# Altium PCB PCB1-B-EVT2.PcbDoc (part 1 of 2)
Units mil, origin at the board's own origin, x right, y up, seen from the top; angles counter-clockwise.
Board outline 2476 x 3729 mil, 2 copper layers (Top Layer, Bottom Layer); 100 components, 79 nets, 360 pads, 170 vias.
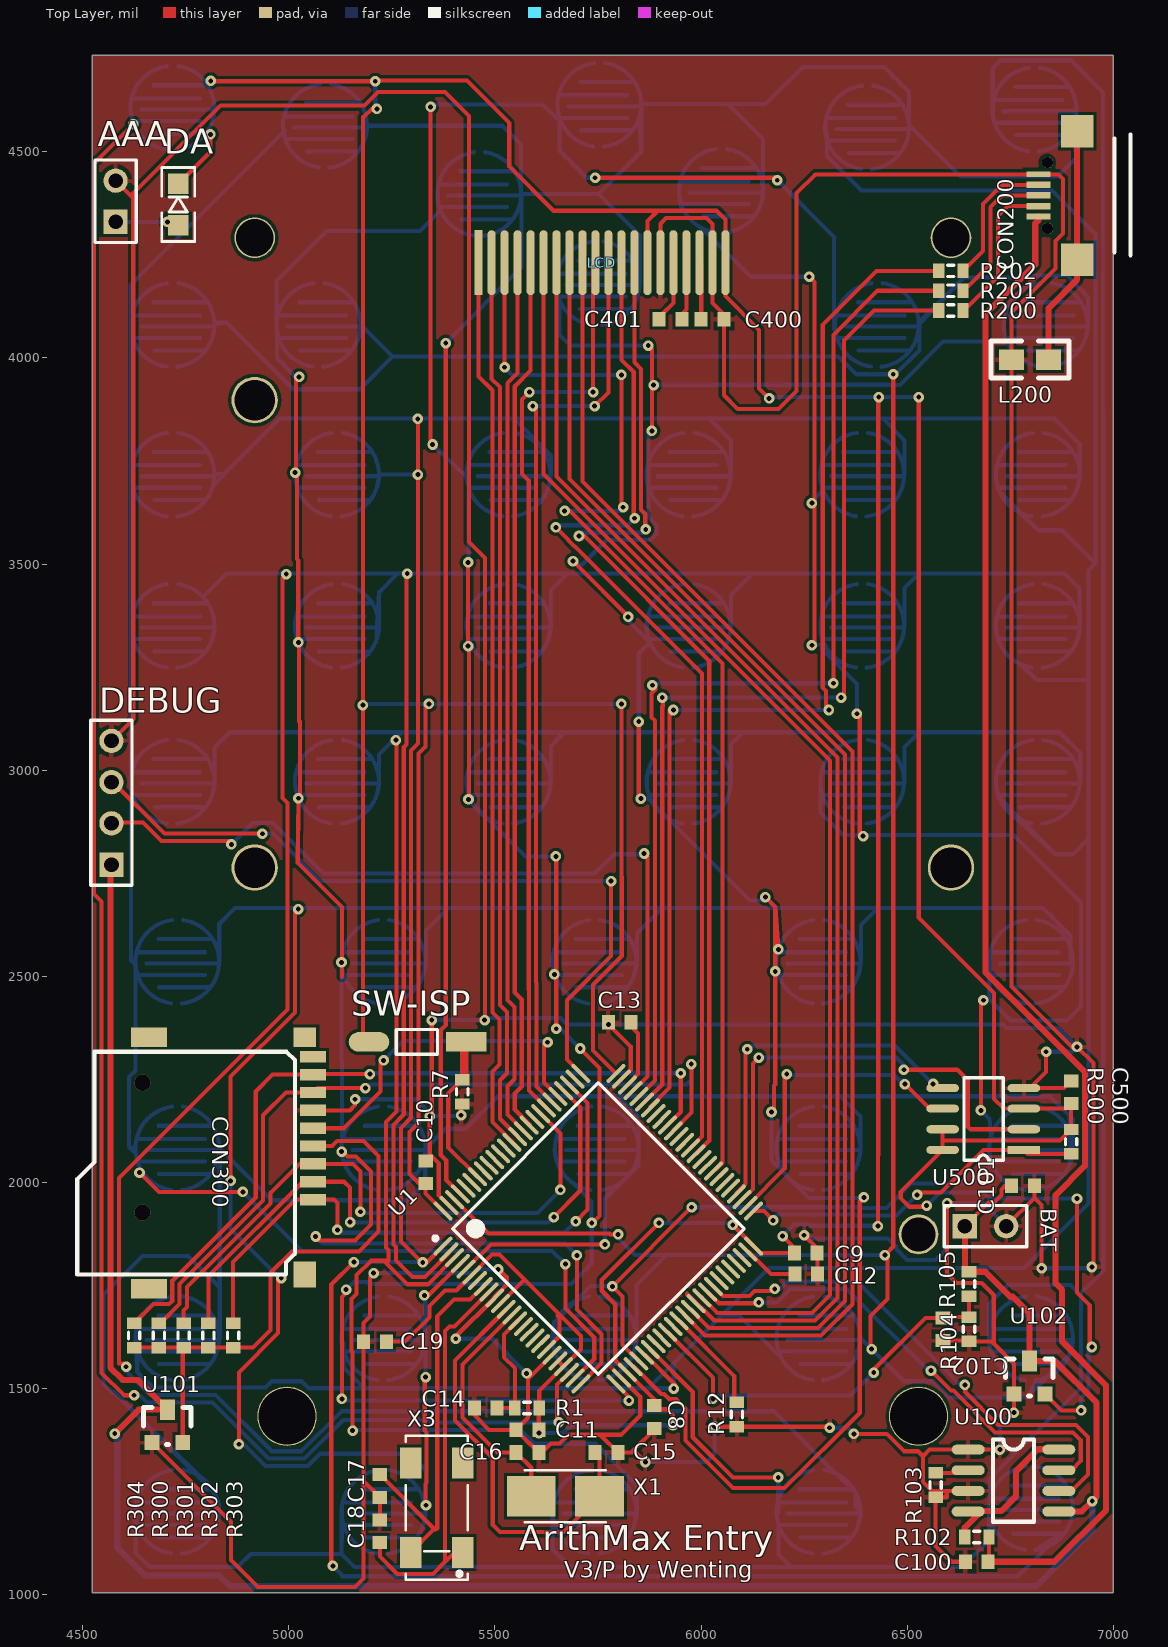
[diagram p0: Top Layer view]
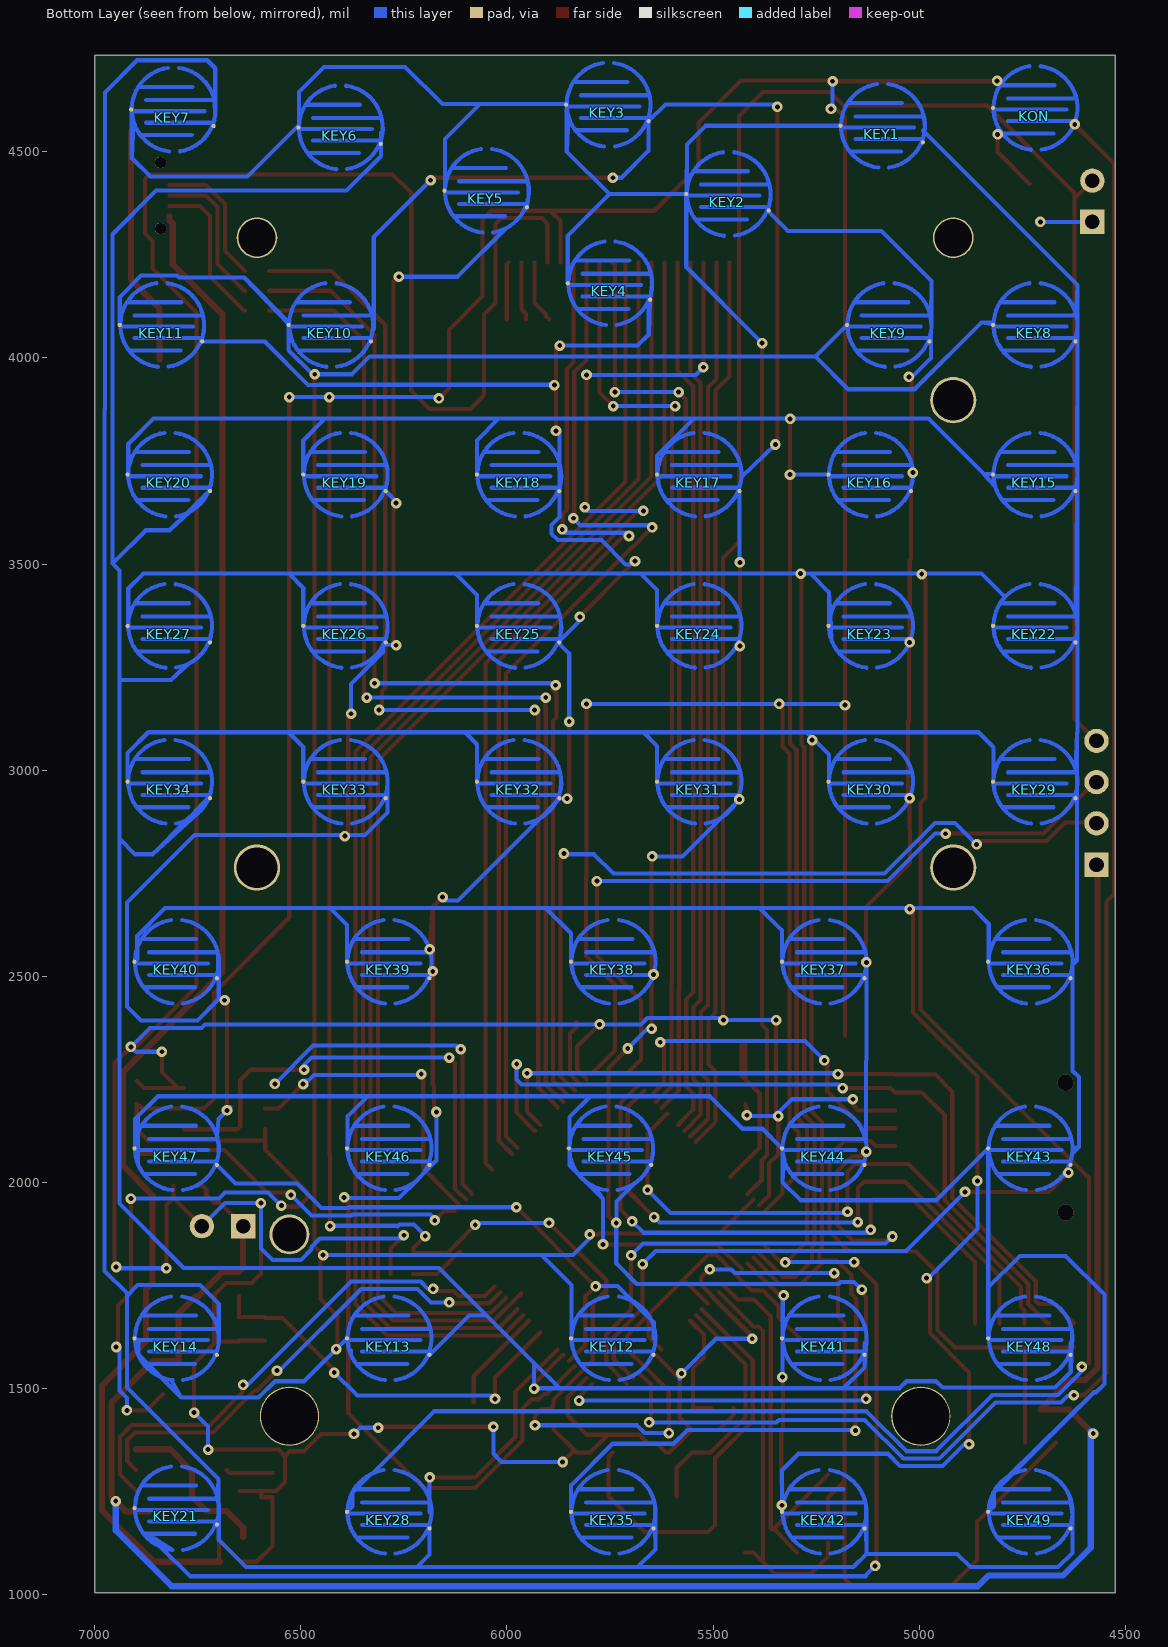
[diagram p1: Bottom Layer view, seen from below]

## Layer stack, top to bottom
Top Layer: signal copper 1.4
Dielectric: dielectric 12.6, FR-4, Dk 4.8
Bottom Layer: signal copper 1.4

## Board outline
4524,1005 4524,4734 7000,4734 7000,1005

## Design rules (kind name [scope] priority, off if disabled: settings)
Clearance [All] p1: gap=8
HoleSize [All] p1: absolutevalues=TRUE maxlimit=250 minlimit=11.81 maxpercent=80.000 minpercent=20.000
MinimumSolderMaskSliver [All] p1 off: minsoldermaskwidth=10
NetAntennae [All] p1 off: netantennaetolerance=0
PolygonConnect [All] p1: connectstyle=Relief reliefconductorwidth=10 reliefentries=4 polygonreliefangle="90 Angle" airgapwidth=10
RoutingVias [All] p1: holewidth=11.81 width=25.59 viastyle="Through Hole" minholewidth=11.81 minwidth=25.59 maxholewidth=11.81 maxwidth=25.59
SilkToSilkClearance [All] p1 off: silktosilkclearance=10
SilkToSolderMaskClearance SilkscreenOverComponentPads [IsPad] p1: minsilkscreentomaskgap=0 clearancetoexposedcopper=TRUE
SolderMaskExpansion [All] p1: expansion=4
Width [All] p1: maxlimit=20 minlimit=10 preferedwidth=10
23 further rules are at their usual default settings.

## Components (designator, comment, footprint, x,y, rotation, side; value= is the part's Value field where it differs from the comment)
AAA "Header 2" HDR1X2 4580,4330 r90 top
BAT "Header 2" HDR1X2 6640,1894 r0 top
C8 "104" 1608[0603] 5887,1431 r270 top
C9 "104" 1608[0603] 6254,1829 r0 top
C10 "104" 1608[0603] 5332,2025 r90 top
C11 "104" 1608[0603] 5579,1400 r180 top
C12 "2.2uF" 1608[0603] 6255,1778 r0 top
C13 "2.2uF" 1608[0603] 5803,2389 r180 top
C14 "104" 1608[0603] 5478,1453 r0 top
C15 "22pF" 1608[0603] 5771,1345 r0 top
C16 "22pF" 1608[0603] 5579,1345 r0 top
C17 "12pF" 1608[0603] 5221,1264 r270 top
C18 "12pF" 1608[0603] 5221,1154 r90 top
C19 "4.7uF" 1608[0603] 5209,1614 r180 top
C100 "105" 1608[0603] 6669,1080 r0 top
C101 "105" 1608[0603] 6781,1992 r180 top
C102 "0.1uF" 1608[0603] 6587,1644 r90 top
C400 "2.2uF" 1608[0603] 6028,4094 r180 top
C401 "0.1uF" 1608[0603] 5926,4094 r0 top
C500 "104" 1608[0603] 6897.85,2219 r90 top
CON200 "USB-MINIAB" USB-MICRO 6924,4394 r90 top
CON300 "TF" TF-2 4860,2047 r180 top
DA "1N4148" 0805D 4684,4349 r90 top
DEBUG "Header 4" HDR1X4 4570,2771 r90 top
KEY1 "Button" BUTTON#1 5311.02,4562.99 r180 bottom
KEY2 "Button" BUTTON#1 5685.04,4397.64 r180 bottom
KEY3 "Button" BUTTON#1 5976.38,4614.17 r180 bottom
KEY4 "Button" BUTTON#1 5972.44,4181.1 r180 bottom
KEY5 "Button" BUTTON#1 6271.65,4405.51 r180 bottom
KEY6 "Button" BUTTON#1 6625.98,4559.06 r180 bottom
KEY7 "Button" BUTTON#1 7031.5,4602.36 r180 bottom
KEY8 "Button" BUTTON#1 4941,4080 r180 bottom
KEY9 "Button" BUTTON#1 5295.28,4080 r180 bottom
KEY10 "Button" BUTTON#1 6649.61,4080 r180 bottom
KEY11 "Button" BUTTON#1 7059.06,4080 r180 bottom
KEY12 "Button" BUTTON#1 5964.5,1622 r180 bottom
KEY13 "Button" BUTTON#1 6507.9,1622 r180 bottom
KEY14 "Button" BUTTON#1 7023.6,1622 r180 bottom
KEY15 "Button" BUTTON#1 4941,3717 r180 bottom
KEY16 "Button" BUTTON#1 5340,3717 r180 bottom
KEY17 "Button" BUTTON#1 5756,3717 r180 bottom
KEY18 "Button" BUTTON#1 6193,3717 r180 bottom
KEY19 "Button" BUTTON#2 6614,3717 r180 bottom
KEY20 "Button" BUTTON#1 7040,3717 r180 bottom
KEY21 "Button" BUTTON#1 7023.6,1210 r180 bottom
KEY22 "Button" BUTTON#1 4941,3350 r180 bottom
KEY23 "Button" BUTTON#1 5340,3350 r180 bottom
KEY24 "Button" BUTTON#1 5756,3350 r180 bottom
KEY25 "Button" BUTTON#1 6193,3350 r180 bottom
KEY26 "Button" BUTTON#1 6614,3350 r180 bottom
KEY27 "Button" BUTTON#1 7040,3350 r180 bottom
KEY28 "Button" BUTTON#1 6507.9,1201 r180 bottom
KEY29 "Button" BUTTON#1 4941,2972 r180 bottom
KEY30 "Button" BUTTON#1 5340,2972 r180 bottom
KEY31 "Button" BUTTON#1 5756,2972 r180 bottom
KEY32 "Button" BUTTON#1 6193,2972 r180 bottom
KEY33 "Button" BUTTON#1 6614,2972 r180 bottom
KEY34 "Button" BUTTON#1 7040,2972 r180 bottom
KEY35 "Button" BUTTON#1 5964.5,1201 r180 bottom
KEY36 "Button" BUTTON#1 4952.7,2535.4 r180 bottom
KEY37 "Button" BUTTON#1 5452.7,2535.4 r180 bottom
KEY38 "Button" BUTTON#1 5964.5,2535.4 r180 bottom
KEY39 "Button" BUTTON#1 6507.9,2535.4 r180 bottom
KEY40 "Button" BUTTON#1 7023.6,2535.4 r180 bottom
KEY41 "Button" BUTTON#1 5452.7,1622 r180 bottom
KEY42 "Button" BUTTON#1 5452.7,1201 r180 bottom
KEY43 "Button" BUTTON#1 4952.7,2082.7 r180 bottom
KEY44 "Button" BUTTON#1 5452.7,2082.7 r180 bottom
KEY45 "Button" BUTTON#1 5970,2082.72 r180 bottom
KEY46 "Button" BUTTON#1 6507.9,2082.7 r180 bottom
KEY47 "Button" BUTTON#1 7023.6,2082.7 r180 bottom
KEY48 "Button" BUTTON#1 4952.7,1622 r180 bottom
KEY49 "Button" BUTTON#1 4952.7,1201 r180 bottom
KON "Button" BUTTON#1 4941,4606.3 r180 bottom
L200 "BLM21PG221SN1" 0805 6843,3996 r180 top
LCD "FPC14591A" LCD_20P 5870,4231 r0 top
R1 "10K" J1-0603 5578,1453 r0 top
R7 "10K" J1-0603 5421,2220 r90 top
R12 "0R" J1-0603 6087,1437 r270 top
R102 "0.4R" J1-0603 6669,1140 r0 top
R103 "5K" J1-0603 6569,1266 r90 top
R104 "1M" J1-0603 6650,1644 r90 top
R105 "1M" J1-0603 6650,1754 r90 top
R200 "22R" J1-0603 6606,4115 r0 top
R201 "22R" J1-0603 6606,4163 r0 top
R202 "0R" J1-0603 6606,4211 r0 top
R300 "47K" J1-0603 4685,1629 r270 top
R301 "47K" J1-0603 4745,1629 r270 top
R302 "47K" J1-0603 4805,1629 r270 top
R303 "47K" J1-0603 4865,1629 r270 top
R304 "47K" J1-0603 4625,1629 r270 top
R500 "10K" J1-0603 6897.85,2099 r90 top
SW-ISP "SW-PB" SOP2 5431,2341 r180 top
U1 "STM32F407VG" 100T1_L 5751,1888 r45 top
U100 "TP4056" SO-8 6648,1352 r0 top
U101 "6209" SOT-23 4668,1369 r0 top
U102 "6209" SOT-23 6759,1487 r0 top
U500 "W25X64" SOIC8 6783,2079 r180 top
X1 "25MHz" 5032 5671,1239 r0 top
X3 "MC306-G-06Q-32.768 (manufacturer JFVNY)" SM8 5359,1211 r90 top

## Footprints (in the part's own frame and the unit in brackets; to place one, negate y for a bottom-side part, rotate by r counter-clockwise, add the part's x,y. Pads: shape width x height; smd on the part's side, far side on the other; paste and mask are expansions set on the pad)
100T1_L [mm] "100-Pin Thin Quad Flat Pack 0.5 mm Pitch, IPC High Density"
  oval 1.55x0.25 smd: 1(-7.525,6) 2(-7.525,5.5) 3(-7.525,5) 4(-7.525,4.5) 5(-7.525,4) 6(-7.525,3.5) 7(-7.525,3) 8(-7.525,2.5) 9(-7.525,2) 10(-7.525,1.5) 11(-7.525,1) 12(-7.525,0.5) 13(-7.525,0) 14(-7.525,-0.5) 15(-7.525,-1) 16(-7.525,-1.5) 17(-7.525,-2) 18(-7.525,-2.5) 19(-7.525,-3) 20(-7.525,-3.5) 21(-7.525,-4) 22(-7.525,-4.5) 23(-7.525,-5) 24(-7.525,-5.5) 25(-7.525,-6) 51(7.525,-6) 52(7.525,-5.5) 53(7.525,-5) 54(7.525,-4.5) 55(7.525,-4) 56(7.525,-3.5) 57(7.525,-3) 58(7.525,-2.5) 59(7.525,-2) 60(7.525,-1.5) 61(7.525,-1) 62(7.525,-0.5) 63(7.525,0) 64(7.525,0.5) 65(7.525,1) 66(7.525,1.5) 67(7.525,2) 68(7.525,2.5) 69(7.525,3) 70(7.525,3.5) 71(7.525,4) 72(7.525,4.5) 73(7.525,5) 74(7.525,5.5) 75(7.525,6)
  oval 0.25x1.55 smd: 26(-6,-7.525) 27(-5.5,-7.525) 28(-5,-7.525) 29(-4.5,-7.525) 30(-4,-7.525) 31(-3.5,-7.525) 32(-3,-7.525) 33(-2.5,-7.525) 34(-2,-7.525) 35(-1.5,-7.525) 36(-1,-7.525) 37(-0.5,-7.525) 38(0,-7.525) 39(0.5,-7.525) 40(1,-7.525) 41(1.5,-7.525) 42(2,-7.525) 43(2.5,-7.525) 44(3,-7.525) 45(3.5,-7.525) 46(4,-7.525) 47(4.5,-7.525) 48(5,-7.525) 49(5.5,-7.525) 50(6,-7.525) 76(6,7.525) 77(5.5,7.525) 78(5,7.525) 79(4.5,7.525) 80(4,7.525) 81(3.5,7.525) 82(3,7.525) 83(2.5,7.525) 84(2,7.525) 85(1.5,7.525) 86(1,7.525) 87(0.5,7.525) 88(0,7.525) 89(-0.5,7.525) 90(-1,7.525) 91(-1.5,7.525) 92(-2,7.525) 93(-2.5,7.525) 94(-3,7.525) 95(-3.5,7.525) 96(-4,7.525) 97(-4.5,7.525) 98(-5,7.525) 99(-5.5,7.525) 100(-6,7.525)
  silkscreen extent -7.65,-6.35 6.35,6.8, body extent -7,-7 7,7, height 1.05
0805 [mil]
  rect 60x50 smd: 1(0,0) 2(90,0)
  silkscreen extent -50,-45 140,45
0805D [mil]
  rect 50x50 smd: A(-27,-48) K(73,-48)
  silkscreen extent -67,-88 113,-8
1608[0603] [mm] "Chip Capacitor, Body 1.6x0.8mm, IPC High Density"
  rect 0.8x0.9 smd: 1(-0.7,0) 2(0.7,0)
  body extent -0.87,-0.48 0.87,0.48, height 1.3
5032 [mm]
  rect 3x2.5 smd: 1(-2.1,0) 2(2.1,0)
  silkscreen extent -2.5,-1.6 2.5,1.6
BUTTON#1 [mil]
  round 10 smd: 1(120,0) 2(320,-40)
  Top Layer lines w10: 321,23 156,23 ; 320,-31 319,-32 156,-32 ; 298,-4 124,-4 ; 269,55 138,55 ; 267,-62 143,-62 ; 238.02,-101.12 ccw(c222.55,-0.14) 235.89,101.15 ; 211.96,-101.38 cw(c223.45,0.14) 208.82,101.24
BUTTON#2 [mil]
  round 10 smd: 1(120,0) 2(320,-40)
  Top Layer lines w10: 321,23 156,23 ; 320,-31 319.91,-31.09 ; 298,-4 124,-4 ; 269,55 138,55 ; 267,-62 143,-62 ; 238.02,-101.12 ccw(c222.55,-0.14) 319.91,-31.09 ; 235.89,101.15 cw(c222.55,-0.14) 319.91,-31.09 ; 211.96,-101.38 cw(c223.45,0.14) 208.82,101.24 ; 156,-32 319,-32 319.91,-31.09
HDR1X2 [mm] "Connector; Header; 2 Position"
  rect 1.5x1.5 hole 0.9: 1(0,0)
  round 1.5 hole 0.9: 2(2.54,0)
  silkscreen extent -1.27,-1.27 3.81,1.27
HDR1X4 [mm] "Connector; Header; 4 Position"
  rect 1.5x1.5 hole 0.9: 1(0,0)
  round 1.5 hole 0.9: 2(2.54,0) 3(5.08,0) 4(7.62,0)
  silkscreen extent -1.27,-1.27 8.89,1.27
J1-0603 [mm] "Chip Resistor, Body 1.6x0.8mm, IPC High Density"
  rect 0.7x0.9 smd: 1(-0.75,0) 2(0.75,0)
  silkscreen extent -0.2,-0.35 0.2,0.35, body extent -0.85,-0.48 0.85,0.48, height 0.9
LCD_20P [mm]
  rect 0.5x4 smd: 1(-10.4,0)
  oval 0.5x4 smd: 2(-9.6,0) 3(-8.8,0) 4(-8,0) 5(-7.2,0) 6(-6.4,0) 7(-5.6,0) 8(-4.8,0) 9(-4,0) 10(-3.2,0) 11(-2.4,0) 12(-1.6,0) 13(-0.8,0) 14(0,0) 15(0.8,0) 16(1.6,0) 17(2.4,0) 18(3.2,0) 19(4,0) 20(4.8,0)
SM8 [mm]
  rect 1.9x1.3 smd: 1(-2.75,-1.6) 2(2.75,-1.6) 3(2.75,1.6) 4(-2.75,1.6)
  silkscreen extent -4.44,-1.91 4.44,1.91
SO-8 [mil]
  oval 80x24 smd: 1(0,0) 2(0,-50) 3(0,-100) 4(0,-150) 5(220,-150) 6(220,-100) 7(220,-50) 8(220,0)
  silkscreen extent 60,-175 160,25
SOIC8 [mm]
  rect 2x0.5 smd: 1(0,0)
  oval 2x0.5 smd: 2(0,-1.27) 3(0,-2.54) 4(0,-3.81) 5(5,-3.81) 6(5,-2.54) 7(5,-1.27) 8(5,0)
  silkscreen extent 1.27,-4.44 3.68,0.64
SOP2 [mm]
  rect 2.5x1.2 smd: 1(0,0)
  oval 2.5x1.2 smd: 2(6,0)
  silkscreen extent 1.78,-0.76 4.32,0.76
SOT-23 [mil]
  rect 36x36 smd: 1(0,0) 2(75,0)
  rect 36x50 smd: 3(38,80)
  silkscreen extent -20,-5 95,85
TF-2 [mm]
  rect 1.4x1.6 smd: 0(-4.55,6.85)
  rect 1.4x1.2 smd: 0(-4.55,-7.75)
  rect 2.2x1.2 smd: 0(5.05,7.75) 0(5.05,-7.75)
  rect 1.6x0.7 smd: 1(-5.05,2.25) 2(-5.05,1.15) 3(-5.05,0.05) 4(-5.05,-1.05) 5(-5.05,-2.15) 6(-5.05,-3.25) 7(-5.05,-4.35) 8(-5.05,-5.45) 9(-5.05,-6.55)
  silkscreen extent -3.94,-6.88 9.47,6.86
USB-MICRO [mm]
  rect 0.35x1.5 smd: 1(-1.3,2.675) 5(1.3,2.675)
  rect 0.4x1.5 smd: 2(-0.65,2.675) 3(0,2.675) 4(0.65,2.675)
  round 0.7 hole 0.7 unplated: 6(-2.032,2.134) 7(2.032,2.134)
  rect 2x2 smd: 8(-3.95,0.3) 9(3.95,0.3)
  silkscreen extent -3.68,-3 3.75,-2

## Part data
AAA BAT: "Header, 2-Pin"
C8 C9 C10 C11 C12 C13 C14 C15 C16 C17 C18 C100 C101 C102 C400 C401 C500: library part "Cap Semi", "Capacitor (Semiconductor SIM Model)"
C19: library part EC
DEBUG: "Header, 4-Pin"
L200: library part BEAD__FERRITE, "EMI Suppression Filters,2A,0805"
R1 R7 R12 R102 R103 R104 R105 R200 R201 R202 R300 R301 R302 R303 R304 R500: library part Res3, "Resistor"
SW-ISP: "Switch"
U1: "ARM Cortex-M3 Microcontroller"
U500: library part W25X16
X1: library part CRY
X3: library part MC306

## Free pads (board coordinates)
  round 112.2 hole 98.43: 0(4917.32,2763.78) 0(4917.32,3897.64) 0(6606.3,2763.78)
  round 98.43 hole 90.55: 0(4917.32,4291.34) 0(6606.3,4291.34)
  round 143.7 hole 137.8: 0(4996.06,1433.07) 0(6527.56,1433.07)
  round 96.46 hole 82.68: 0(6527.56,1874.02)

## Via types
v1: diameter 25.59, hole 11.81, Top Layer to Bottom Layer, tented both sides, 168 vias
v2: diameter 39.37, hole 39.37, Top Layer to Bottom Layer, tented both sides, 2 vias

## Nets (pads, with @x,y where several pads share a name; then routed paths per layer and width w, separated by ;. In a path a pad name is that pad's centre, name@x,y a point inside that pad or via, vN(x,y) a via of type N, cw(c..) or ccw(c..) an arc to the next point about the centre after c; other vN are vias at no path point)
ADC12_IN8: C102.2 R104.2 R105.1 U1.35 | length 965.7
  Top Layer w10: U1.35@5918.73,1636.75 6029,1526.48 v1(6029,1475) ; v1(6419,1539) 6419,1546 6544.56,1671.56 C102.2@6587,1671.56 6588.97,1673.53 R104.2@6650,1673.53 R105.1@6650,1724.47
  Bottom Layer w10: v1(6029,1475) 6037,1483 6363,1483 v1(6419,1539)
BOOT0: R7.2 SW-ISP.1 U1.94 | length 476.3
  Top Layer w10: U1.94@5458,2013.97 5386.79,2085.18 5386.79,2215.32 R7.2@5421,2249.53 ; R7.2@5421,2249.53 5421,2341 SW-ISP.1@5431,2341 5431,2259.53 R7.2@5421,2249.53
BOOT1: R12.1 U1.37 | length 253.6
  Top Layer w10: U1.37@5946.57,1664.59 6080.53,1530.63 R12.1@6080.53,1466.53
CHRG: U1.42 U100.7 | length 1171
  Top Layer w10: U1.42@6016.17,1734.19 6043.36,1707 6138,1707 v1(6140,1709) ; v1(6557.8,1543.72) 6606.52,1495 6612,1495 6713,1394 6902.54,1394 6921,1375.54 6921,1324 U100.7@6900,1303
  Bottom Layer w10: v1(6140,1709) 6184,1709 6216.6,1741.6 6353.4,1741.6 6554,1541 6560.52,1541 v1(6557.8,1543.72)
FSMC_A16: LCD.3 U1.58 | length 2772.1
  Top Layer w10: v1(5523.54,3977.46) LCD.3@5523.54,4231 ; v1@5680.54,3630 6052.18,3258.36 6052.18,2047.49 U1.58@6035.84,2031.16 ; v1@5807,3637.85 v1(5807,3959)
  Bottom Layer w10: v1(5523.54,3977.46) 5542,3959 v1(5807,3959) ; v1(5669,3629) 5804,3629 5811,3636 v1(5811,3637.85)
FSMC_D0: LCD.13 U1.61 | length 2477.7
  Top Layer w10: v1(5704,3568) 5717.09,3568 6020,3265.09 6020,2101.32 U1.61@5988.33,2069.65 ; LCD.13@5838.5,4231 5838.5,3989.43 5854.8,3973.14 5854.8,3631.68 5864.8,3621.68 5864.8,3590.76 5864,3589.96 5864,3586 v1(5866,3584)
  Bottom Layer w10: v1(5704,3568) 5712,3576 5858,3576 v1(5866,3584)
FSMC_D1: LCD.12 U1.62 | length 2497.3
  Top Layer w10: v1(5648,3589) 5678.2,3558.8 5678.2,3557.32 5693.32,3542.2 5694.8,3542.2 6002,3235 6002,2111.16 U1.62@5974.41,2083.57 ; LCD.12@5807.01,4231 5807.01,3995.47 5836.8,3965.68 5836.8,3615.26 v1(5839,3611)
  Bottom Layer w10: v1(5648,3589) 5653,3594 5822,3594 v1(5839,3611)
FSMC_D2: LCD.11 U1.81 | length 2210.1
  Top Layer w10: v1@5600.03,3877 5600.03,2485.62 5601.21,2484.44 5601.21,2232.66 U1.81@5638.95,2194.92 ; v1(5742,3883) 5775.51,3916.51 LCD.11@5775.51,4231
  Bottom Layer w10: v1(5592,3883) v1(5742,3883)
FSMC_D3: LCD.10 U1.82 | length 2238.6
  Top Layer w10: v1(5583.59,3917) 5566.2,3899.61 5566.2,3718.88 5582.03,3703.06 5582.03,2467.62 5583.21,2466.44 5583.21,2222.82 U1.82@5625.03,2181 ; v1(5738.31,3917) 5738.31,4225.3 LCD.10@5744.02,4231
  Bottom Layer w10: v1(5583.59,3917) v1(5738.31,3917)
FSMC_D4: LCD.9 U1.38 | length 3255.8
  Top Layer w10: LCD.9@5712.52,4231 5712.52,3699.85 6367,3045.37 6367,1704.63 6291.37,1629 6010,1629 U1.38@5960.49,1678.51
FSMC_D5: LCD.8 U1.39 | length 3216
  Top Layer w10: LCD.8@5681.02,4231 5681.02,3705.89 6349,3037.91 6349,1712.09 6283.91,1647 6019.84,1647 U1.39@5974.41,1692.43
FSMC_D6: LCD.7 U1.40 | length 3210.7
  Top Layer w10: LCD.7@5649.53,4231 5649.53,3711.93 6331,3030.46 6331,1719.54 6276.46,1665 6032.06,1665 5966.23,1730.83 5966.23,1728.45
FSMC_D7: LCD.6 U1.41 | length 3136.3
  Top Layer w10: LCD.6@5618.03,4231 5618.03,3717.97 6313,3023 6313,1727 6269,1683 6039.52,1683 U1.41@6002.25,1720.27
FSMC_NE1: LCD.1 U1.88 | length 2181.1
  Top Layer w10: LCD.1@5460.55,4231 5460.55,3955.2 5494.2,3921.54 5494.2,2412.63 5511.21,2395.62 5511.21,2286.38 5494.2,2269.37 5494.2,2147.18 5541.51,2099.87 U1.88@5541.51,2097.49
FSMC_NOE: LCD.5 U1.85 | length 2136.2
  Top Layer w10: U1.85@5583.27,2139.25 5583.27,2141.74 5548.2,2176.81 5548.2,2215.37 5565.21,2232.38 5565.21,2443.78 5548.2,2460.79 5548.2,3931.2 5586.54,3969.54 LCD.5@5586.54,4231
FSMC_NWE: LCD.4 U1.86 | length 2146.3
  Top Layer w10: LCD.4@5555.04,4231 5555.04,3963.49 5530.2,3938.66 5530.2,2442.79 5547.21,2425.78 5547.21,2250.38 5530.2,2233.37 5530.2,2164.47 U1.86@5569.35,2125.33
GND: AAA.2 BAT.2 C8.2 C9.2 C10.2 C11.2 C12.2 C13.2 C14.1 C15.2 C16.2 C17.2 C18.2 C19.2 C100.1 C101.1 C102.1 C400.1 C500.2 CON200.5 CON300.6 DEBUG.4 L200.2 LCD.15 LCD.19 R7.1 R12.2 R103.1 R104.1 U1.10 U1.20 U1.27 U1.74 U1.99 U100.1 U100.3 U101.1 U102.1 U500.4 | length 19295.8
  Top Layer w10: DEBUG.4@4570,3071 4623,3124 4623,4387 ; AAA.2@4580,4430 4623,4387 ; U101.1@4668,1369 4860,1177 4860,1084 4925,1019 5161,1019 5181.44,1039.44 5181.44,1276 ; CON300.6@5058.82,2174.95 5148,2174.95 5161,2187.95 v1(5161,2202) ; v1(5206,1780) 5197,1771 5197,1675 5181.44,1659.44 C19.2@5181.44,1614 5181.44,1276 ; C18.2@5221,1181.56 C17.2@5221,1236.44 5181.44,1276 ; v1(5342,2161) 5342,2067.72 5364,2045.72 5364,1968.77 U1.99@5388.4,1944.37 ; v1@5347,2166 v1(5347,2394) ; v1@5400.05,1620.95 5400.93,1620.07 5400.93,1621.45 v1@5405,1625.52 ; v1(5405,1621) v1@5405,1625.52 ; v1(5418,2163) 5418,2181 5421,2184 R7.1@5421,2190.47 ; C14.1@5450.44,1453 5450.44,1435.56 5486,1400 C11.2@5551.44,1400 ; v1@5476,2394 5476,3515 5437,3554 5437,4587 5379,4645 5217,4645 5184,4612 4835,4612 4623,4400 4623,4387 ; v1(5508,1789) 5510,1789 5529,1770 5529,1752.01 5499.75,1722.76 U1.10@5499.75,1720.27 ; U1.20@5638.95,1581.08 5580.75,1522.87 5580.75,1429.31 C11.2@5551.44,1400 ; v1(5775.44,2383.56) 5829.47,2329.53 5829.47,2272.7 U1.74@5807.37,2250.6 ; U1.27@5807.37,1525.4 5852.58,1480.19 5852.58,1434.58 5806,1388 5755.56,1388 ; v1(5865,1322) 5836.5,1350.5 ; C8.2@5887,1403.44 5887,1401 5836.5,1350.5 ; LCD.15@5901.5,4231 5901.5,4325.5 5915,4339 6013,4339 6027.48,4324.52 LCD.19@6027.48,4231 6027.48,4133.52 6055.56,4105.44 C400.1@6055.56,4094 6055.56,3909.44 6089,3876 6188,3876 6232,3920 6232,4400 6277.18,4445.18 CON200.5@6818.68,4445.18 6866.82,4445.18 6878,4434 6878,4301.43 6859.82,4283.24 6859.82,4216.82 6753,4110 L200.2@6753,3996 6753,2475.79 6899.79,2329 v1(6912,2329) 6951.57,2289.43 v1@6951.57,1797.57 ; v1(6033,1407.47) R12.2@6087,1407.47 6309.53,1407.47 v1(6312,1405) ; v1(6250,1872) 6282.56,1839.44 C9.2@6282.56,1828 ; C9.2@6281.56,1829 C9.2@6282.56,1828 ; C12.2@6282.56,1778 C9.2@6282.56,1828 ; v1(6371,1390) 6450.63,1390 6492.41,1348.22 6525.78,1348.22 6538,1336 ; C102.1@6587,1616.44 6648.03,1616.44 R104.1@6650,1614.47 6704.53,1614.47 6710,1609 ; v1(6597,1950) 6597,1779 6620,1756 6681,1756 6710,1727 6710,1609 ; C100.1@6641.44,1080 6607,1080 6569,1118 R103.1@6569,1236.47 6596,1236.47 6596,1252 ; U100.3@6648,1252 6596,1252 ; v1(6725,1352) U100.1@6648,1352 6554,1352 6538,1336 ; BAT.2@6740,1894 6808.56,1962.56 ; v1(6759,1442) U102.1@6759,1487 6759,1560 6710,1609 ; U500.4@6783,2229 U500.4@6798,2229 ; C101.1@6808.56,1992 6808.56,1962.56 ; v1(6826,1792) 6826,1945.12 6808.56,1962.56 ; v1(6837,2317) 6837,2268 U500.4@6798,2229 ; C500.2@6897.85,2246.56 6880.29,2229 U500.4@6798,2229 ; v1@5405,1625.52 5405,1627.9 5497.37,1720.27 U1.10@5499.75,1720.27 ; v1@5405,1625.52 U1.10@5499.75,1720.27 ; C11.2@5551.44,1400 5551.56,1400 5577,1374.56 ; 5577,1374.56 5577,1373 5583,1367 5584.56,1367 ; 5577,1374.56 5584.56,1367 ; 5584.56,1367 C16.2@5606.56,1345 5614,1345 5636,1367 5657,1367 5678,1388 5755.56,1388 ; 5755.56,1388 C15.2@5798.56,1345 5831,1345 5836.5,1350.5 ; 6538,1336 6538,1274 6560,1252 6596,1252
  Bottom Layer w10: v1(5161,2202) 5309,2202 v1@5350,2161 ; v1(5206,1780) 5447,1780 5456,1789 v1(5508,1789) ; v1(5342,2161) v1@5350,2161 ; v1(5347,2394) v1(5475,2394) ; v1@5400.05,1620.95 5493.05,1620.95 ; v1(5418,2163) 5416,2161 v1@5350,2161 ; v1@5479.8,2398.8 5659.68,2398.8 5674.92,2383.56 v1(5775.44,2383.56) 6732.44,2383.56 6741,2375 6866,2375 v1(6912,2329) 6900,2317 v1(6837,2317) ; 5493,1621 5493.05,1620.95 ; 5580.75,1522.87 5584,1530 v1(5577,1537) 5493.05,1620.95 ; v1(5865,1322) 6013,1322 6033,1342 v1(6033,1407.47) ; v1(6250,1872) 6250,1864 6454,1864 6474,1844 6474,1838 6500,1812 6569,1812 6597,1840 v1(6597,1950) 6684,1950 BAT.2@6740,1894 ; v1(6312,1405) 6356,1405 v1(6371,1390) ; v1(6725,1352) 6725,1408 v1(6759,1442) ; v1(6826,1792) v1@6949,1792
  other v1: 6948,1795
I2C1_SCL: U1.95
I2C1_SDA: U1.96
KI_0: KEY1.2 KEY8.2 KEY15.2 KEY22.2 KEY29.2 KEY36.2 KEY43.2 U1.24 | length 5155.4
  Top Layer w10: v1(4638.05,2023.95) 4685,1977 v1(4889,1977) ; v1(5671,1802) 5671,1694.38 5741,1624.38 5741,1571.77 U1.24@5694.63,1525.4
  Bottom Layer w10: 4616.29,3349.72 4616.29,3349.99 ; 4616.57,3724.48 4616.48,4040 4616.47,4073.76 ; 4617.03,2959.54 4617.53,2987.74 ; 4619,3373.25 4616.81,3676.97 4616.57,3709.24 ; 4619,4103.25 4616.54,4176.7 ; 4620.81,3001.92 4617.53,3090.62 ; 4627.99,2083.01 4612.75,2086.23 ; 4628.06,2539 4617.53,2538.38 ; 4628.73,2070.24 4612.75,2086.23 ; v1(4889,1977) 5032,1834 5639,1834 v1(5671,1802) ; 4986.51,4556.49 4990.83,4550.99 4987.45,4547.61 4616.54,4176.7 ; 4612.75,2086.23 4612.75,2255.42 4628.27,2270.95 4628.27,2495.4 4628.27,2527.64 ; 4616.29,3349.99 4616.29,3349.58 4616.29,3310 4616.29,3091.86 4617.53,3090.62 ; 4616.29,3349.99 4616.57,3350.28 4616.57,3357.48 4616.57,3677 4616.57,3709.24 ; 4616.47,3709.34 4616.57,3709.24 ; 4616.47,3709.34 4616.57,3709.24 ; 4616.47,3709.34 4616.47,3710.76 ; 4616.47,3710.76 4616.47,3722.97 ; 4616.47,3710.76 4616.47,3722.97 ; 4616.47,3722.97 4616.47,4040 4616.47,4073.76 ; 4616.47,4073.76 4616.47,4085.97 ; 4616.47,4073.76 4616.47,4085.97 ; 4616.47,4085.97 4616.54,4087.04 4616.54,4176.7 ; 4617.53,2538.38 4628.27,2527.64 ; 4617.53,2538.38 4628.27,2527.64 ; 4617.53,2538.38 4617.53,2932 4617.53,2955.99 4617.53,2987.74 ; 4617.53,2987.74 4617.53,3090.62 ; 4617.53,2987.73 4617.53,3090.62
KI_1: KEY2.2 KEY9.2 KEY16.2 KEY23.2 KEY30.2 KEY37.2 KEY44.2 U1.25 | length 4192.8
  Top Layer w10: v1@5017,3954 v1@5018,3954 ; v1@5018,3721.88 v1@5018,3954 ; v1@5019.81,3717.48 5019.81,3512.19 5023,3509 v1@5023,3310 ; v1@5022,2932 5027,2937 5027,3118 5025,3118 v1@5025,3308.39 ; v1(5023.39,2932) 5022,2775 5129,2668 5129,2499.1 ; v1(5025,3954) v1@5018,3954 ; v1(5065,1869) 5074.8,1859.2 5161.2,1859.2 5199.8,1897.8 5199.8,2026.66 5163.43,2063.03 5142.97,2063.03 5135,2071 5131.58,2072.89 v1(5128.29,2074.71) ; v1(5699,1823) 5699,1691.83 5759,1631.83 5759,1561.93 U1.25@5708.55,1511.48
  Bottom Layer w10: 4970.6,4082.74 4970.6,4186.6 ; 4971.25,4068 4971.44,4039.97 4971.71,3999.29 ; 4971.37,4092.64 4970.6,4186.6 ; 4971.71,4064.62 4971.71,4040 4971.71,3999.29 ; v1@5017,3954 4971.71,3999.29 ; v1(5065,1869) 5082,1852 5670,1852 v1(5699,1823) ; v1(5128,2533.67) 5128.08,2499.1 5128.09,2495.39 5129,2096.91 ; KEY2.2@5368.43,4357.64 5318.79,4308 5092,4308 4970.6,4186.6
  other v1: 5023.39,3310 5015.41,3721.88
KI_2: KEY3.2 KEY10.2 KEY17.2 KEY24.2 KEY31.2 KEY38.2 KEY45.2 U1.26 | length 6212.9
  Top Layer w10: v1(5129,1475) 5129,1722 5139,1732 v1(5139,1740) ; v1(5344,4609) 5344,3795 v1(5349,3790) ; v1(5435,3301) v1(5435,3504) ; v1@5437,2938.18 v1@5437,3299 ; v1(5649,2373) 5649,2500.09 v1(5644.5,2504.59) 5649,2502 v1@5649,2791 ; v1(5707,2325) 5754,2278 5754,1919 5737,1902 v1(5735,1902) ; v1(5743,4437) 6185,4437 v1(6185,4431) ; U1.26@5793.45,1511.48 5827.93,1477 5827.93,1473.93 v1(5825,1471)
  Bottom Layer w10: v1(5129,1475) 5133,1471 v1(5825,1471) ; v1(5139,1740) 5158,1759 5190.52,1759 5195.32,1754.2 5685.2,1754.2 5734,1803 ; v1(5344,4609) 5350,4615 5615.55,4615 KEY3.2@5656.38,4574.17 5656.38,4502.62 5722,4437 v1(5743,4437) ; v1(5349,3790) 5431.42,3711.58 ; 5431.74,3707.26 5432.03,3706.97 5432.03,3704.54 ; v1(5435,3504) 5436,3505 KEY17.2@5436,3677 ; v1(5436,2929) 5446.07,2918.93 5480.51,2884.49 5574,2791 v1(5648,2791) ; v1(5649,2373) 5659,2373 v1(5707,2325) ; KEY45.2@5652.89,2043.9 KEY45.2@5652.98,2043.6 ; v1@5734,1902 5734,1953.82 ; 5735,1804 v1(5735,1902) ; v1(6185,4431) 6323,4293 6323,4070.18 6325.64,4067.54 ; 5734,1953.82 5689.11,1998.72 5734,1953.82
KI_3: KEY4.2 KEY11.2 KEY18.2 KEY25.2 KEY32.2 KEY39.2 KEY46.2 U1.29 | length 5717.2
  Top Layer w10: v1(5689.45,3507) 5697.72,3498.72 5823,3373.45 v1(5823,3372) ; U1.29@5835.21,1553.24 5837.6,1553.24 5903.53,1487.31 5910.1,1487.31 5923.2,1474.2 5939.8,1474.2 5962,1452 5962,1374.54 6077.74,1258.8 6202.8,1258.8 6385,1441 6385,1954 v1@6393,1962 ; v1(5849,3118) 5849,2936 v1(5854,2931) ; v1(5872,4030) 5872,4029 5881,4020 v1(5881,3823) ; v1(6156,2692) 6180,2668 ; v1(6171,2171) 6177,2177 6177,2235 6180,2238 v1(6180,2512) 6180,2668 ; v1(6187.71,2565.32) 6180,2668
  Bottom Layer w10: 5653.44,4147.29 5653.62,4141.14 5656.07,4056.93 ; KEY4.2@5656.07,4140.53 5656.07,4056.93 ; 5701.52,3499 5712,3499 5771,3558 5876.48,3558 5891.8,3573.32 5891.8,3594.68 5872.5,3613.98 KEY18.2@5872.5,3677.5 ; v1(5823,3372) 5823,3363.39 5876.39,3310 5849,3282.61 v1(5849,3118) ; v1(5854,2931) KEY32.2@5872,2931 ; 5869.59,3700.59 KEY18.2@5872.5,3677.5 ; v1(5872,4030) 5683,4030 5656.07,4056.93 ; KEY18.2@5873,3677 KEY18.2@5872.5,3677.5 ; 5874,3750.55 5872.91,3705 5872.5,3687.83 ; 5878.35,2927.65 5872.37,2930.81 KEY32.2@5872,2931 ; v1(5881,3823) 5878,3823 5872.5,3817.5 5872.5,3745.9 ; v1(5885,3934) 5885,3935 6455.38,3935 6455.65,3934.73 6482.21,3934.73 6587.48,4040 KEY11.2@6739.06,4040 ; v1(6156,2692) 6148,2684 6119,2684 5919.94,2883.06 ; v1(6171,2171) 6171,2053 ; 6194.57,2035.7 6186.9,2041.33 6171,2053 ; v1(6395,1964) 6393,1962 6262,1962 ; KEY32.2@5872,2931 5881.65,2921.35 ; KEY18.2@5872.5,3677.5 5872.5,3687.83 ; 5872.5,3687.83 5872.5,3745.9 ; 5872.5,3687.83 5872.5,3745.9 ; 5881.65,2921.35 5919.94,2883.06 ; 5881.65,2921.35 5919.94,2883.06 ; 6171,2053 6207.01,2016.99 ; 6207.01,2016.99 6219.77,2004.23 6262,1962 ; 6207.01,2016.99 6262,1962
KI_4: KEY5.2 KEY12.2 KEY19.2 KEY26.2 KEY33.2 KEY40.2 KEY47.2 U1.30 | length 5196.8
  Top Layer w10: v1(5785,1748) 5810,1723 5810,1606.29 U1.30@5849.13,1567.16 ; v1@5786,1749 v1(5977,1940) ; v1(6262,4197) 6275,4184 6275,3305 6273,3303 v1(6269,3303) ; v1(6378,3137) 6385,3130 6385,2841 6386,2840 v1(6393,2840) ; v1(6679,2175) 6679,2436 v1(6685,2442)
  Bottom Layer w10: 5644,1621.17 5644,1660.83 ; 5644.31,1651.92 5644,1660.83 ; 5659,1681.5 5667.17,1684 ; 5696.55,1713.39 5732,1748.83 ; v1(5785,1748) 5784.17,1748.83 5732,1748.83 ; 5949.41,4383.04 KEY5.2@5951.65,4365.51 5957.98,4359.19 ; v1(5977,1940) 6382.52,1940 6384.32,1938.2 6449.72,1938.2 6509.32,1997.8 6658.7,1997.8 KEY47.2@6703.6,2042.7 ; 6002.91,4314.25 6120.17,4197 v1(6262,4197) ; v1(6269,3303) 6294.42,3305.22 6299.35,3305.65 ; v1(6269,3648) 6269,3652 KEY19.2@6294,3677 ; 6290,2959.82 6290,2897 6344,2843 6758,2843 6922,2679 6922,2427 6888,2393 6751,2393 6699.09,2444.91 6699.09,2528.9 ; 6302,3303 6300.67,3303 6300.67,3286.33 6378,3209 v1(6378,3137) ; v1@6671,2183 v1(6679,2175) 6700,2154 6703.41,2112.62 ; v1(6685,2442) v1@6690.09,2442 ; 6699.22,2074.34 6700,2097.6 6700,2067.53 ; 6700.15,2519.26 6700.65,2554.15 ; 5644,1660.83 5650.43,1667.27 ; 5650.43,1667.26 5667.17,1684 ; 5650.43,1667.27 5667.17,1684 ; 5667.17,1684 5732,1748.83
KI_5: KEY6.2 KEY13.2 KEY20.2 KEY27.2 KEY34.2 KEY41.2 KEY48.2 U1.31 | length 7621.5
  Top Layer w10: U1.31@5863.05,1581.08 5865.44,1581.08 5936.26,1510.26 v1@5936.26,1502.26
  Bottom Layer w10: 4629.72,1640.58 4630.92,1597.58 4631.35,1581.96 4632.51,1540.49 ; 4632.51,1610 4632.51,1591.81 4632.51,1540.49 ; 5128.27,1614.23 5130.46,1581.85 5132.51,1551.49 ; 5132.51,1610 5132.51,1591.81 5132.51,1551.49 ; v1(5934,1500) v1@5934,1501 ; v1@5936.26,1502.26 5935,1501 v1@5934,1501 ; KEY13.2@6187.9,1582 6092.4,1677.5 6049.5,1677.5 ; 6305.79,4547.06 6305.79,4528.87 6305.79,4489.21 6389,4406 6851,4406 6957.06,4299.94 6957.06,4072.49 6957,4072.43 6957,3501 ; 6721,2938.18 6723.63,2935.05 6732.06,2925 ; KEY34.2@6722.24,2934.82 6732.06,2925 ; 6730.39,3670 6777.59,3622.8 6818.39,3582 ; 6750,2895.13 6859.67,2796 ; 6778.07,3255.6 6814.67,3219 ; 4632.51,1540.49 4670.73,1502.27 4944,1502.27 4959.65,1517.92 5031.21,1517.92 5048.13,1501 5183,1501 ; 5132.51,1551.49 5183,1501 ; 5183,1501 5873,1501 ; 5873,1501 v1@5934,1501 ; 5873,1501 5934,1562 ; v1@5934,1501 5934,1562 ; 5934,1562 6049.5,1677.5 ; 6049.5,1677.5 6165,1793 6784,1793 6940,1949 6940,2834 ; 6732.06,2925 6755.5,2901.56 6755.5,2900.17 6778.07,2877.6 6859.67,2796 ; 6814.67,3219 6771.26,3258.74 6814.67,3219 ; 6814.67,3219 6940,3219 ; 6818.39,3582 6876,3582 6957,3501 ; 6818.39,3582 6771.26,3625.74 6818.39,3582 ; 6859.67,2796 6902,2796 6940,2834 ; 6940,2834 6940,3219 ; 6940,3219 6940,3484 6957,3501